# Allegro board HY_IP5389_V10_250411.brd
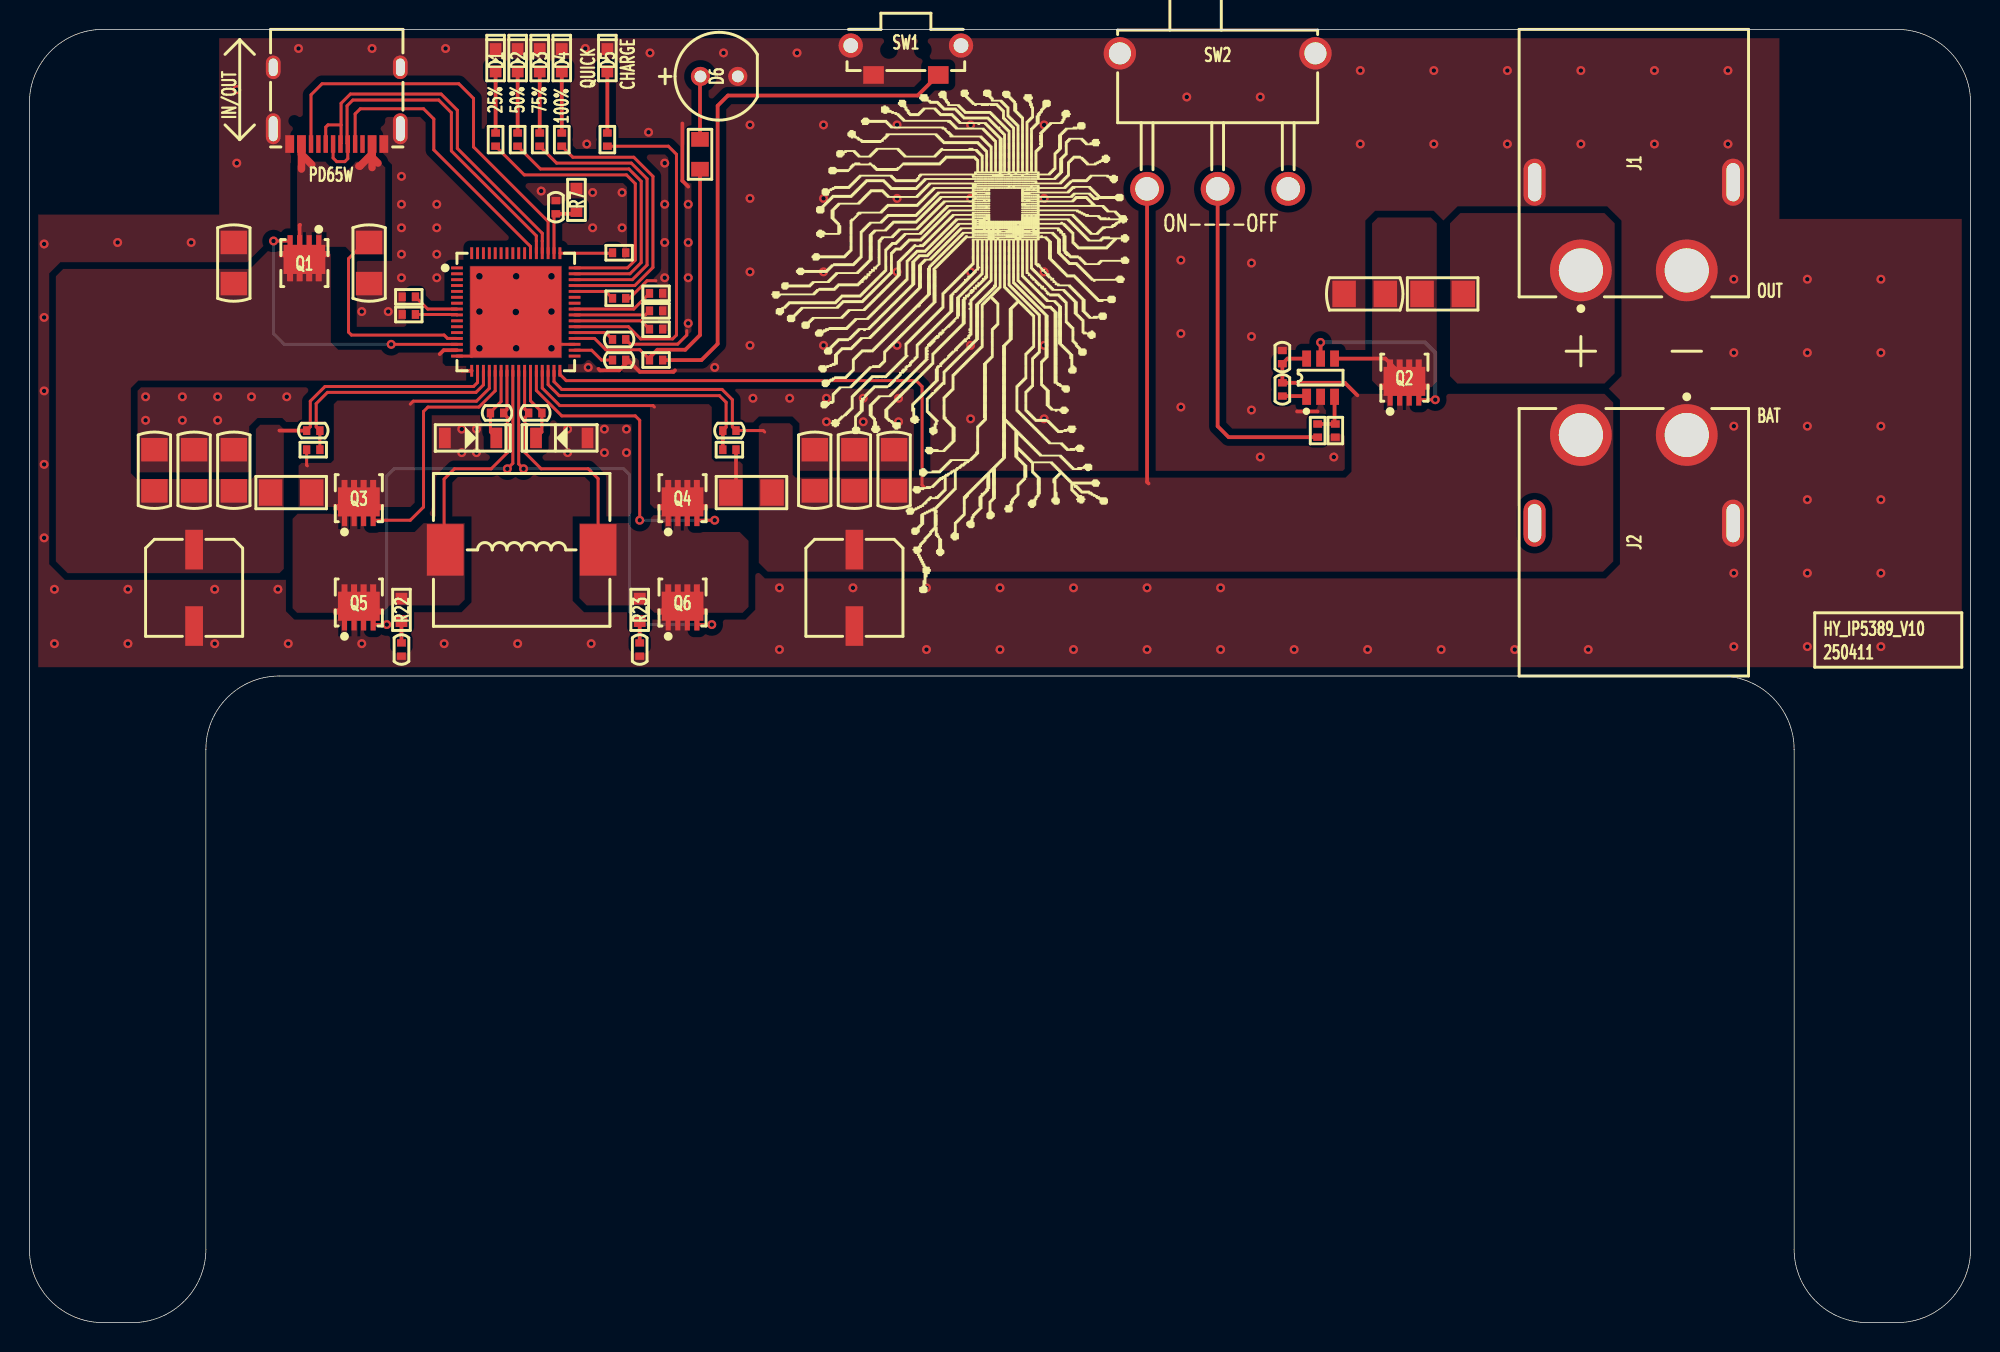
[diagram p0: board, top side]
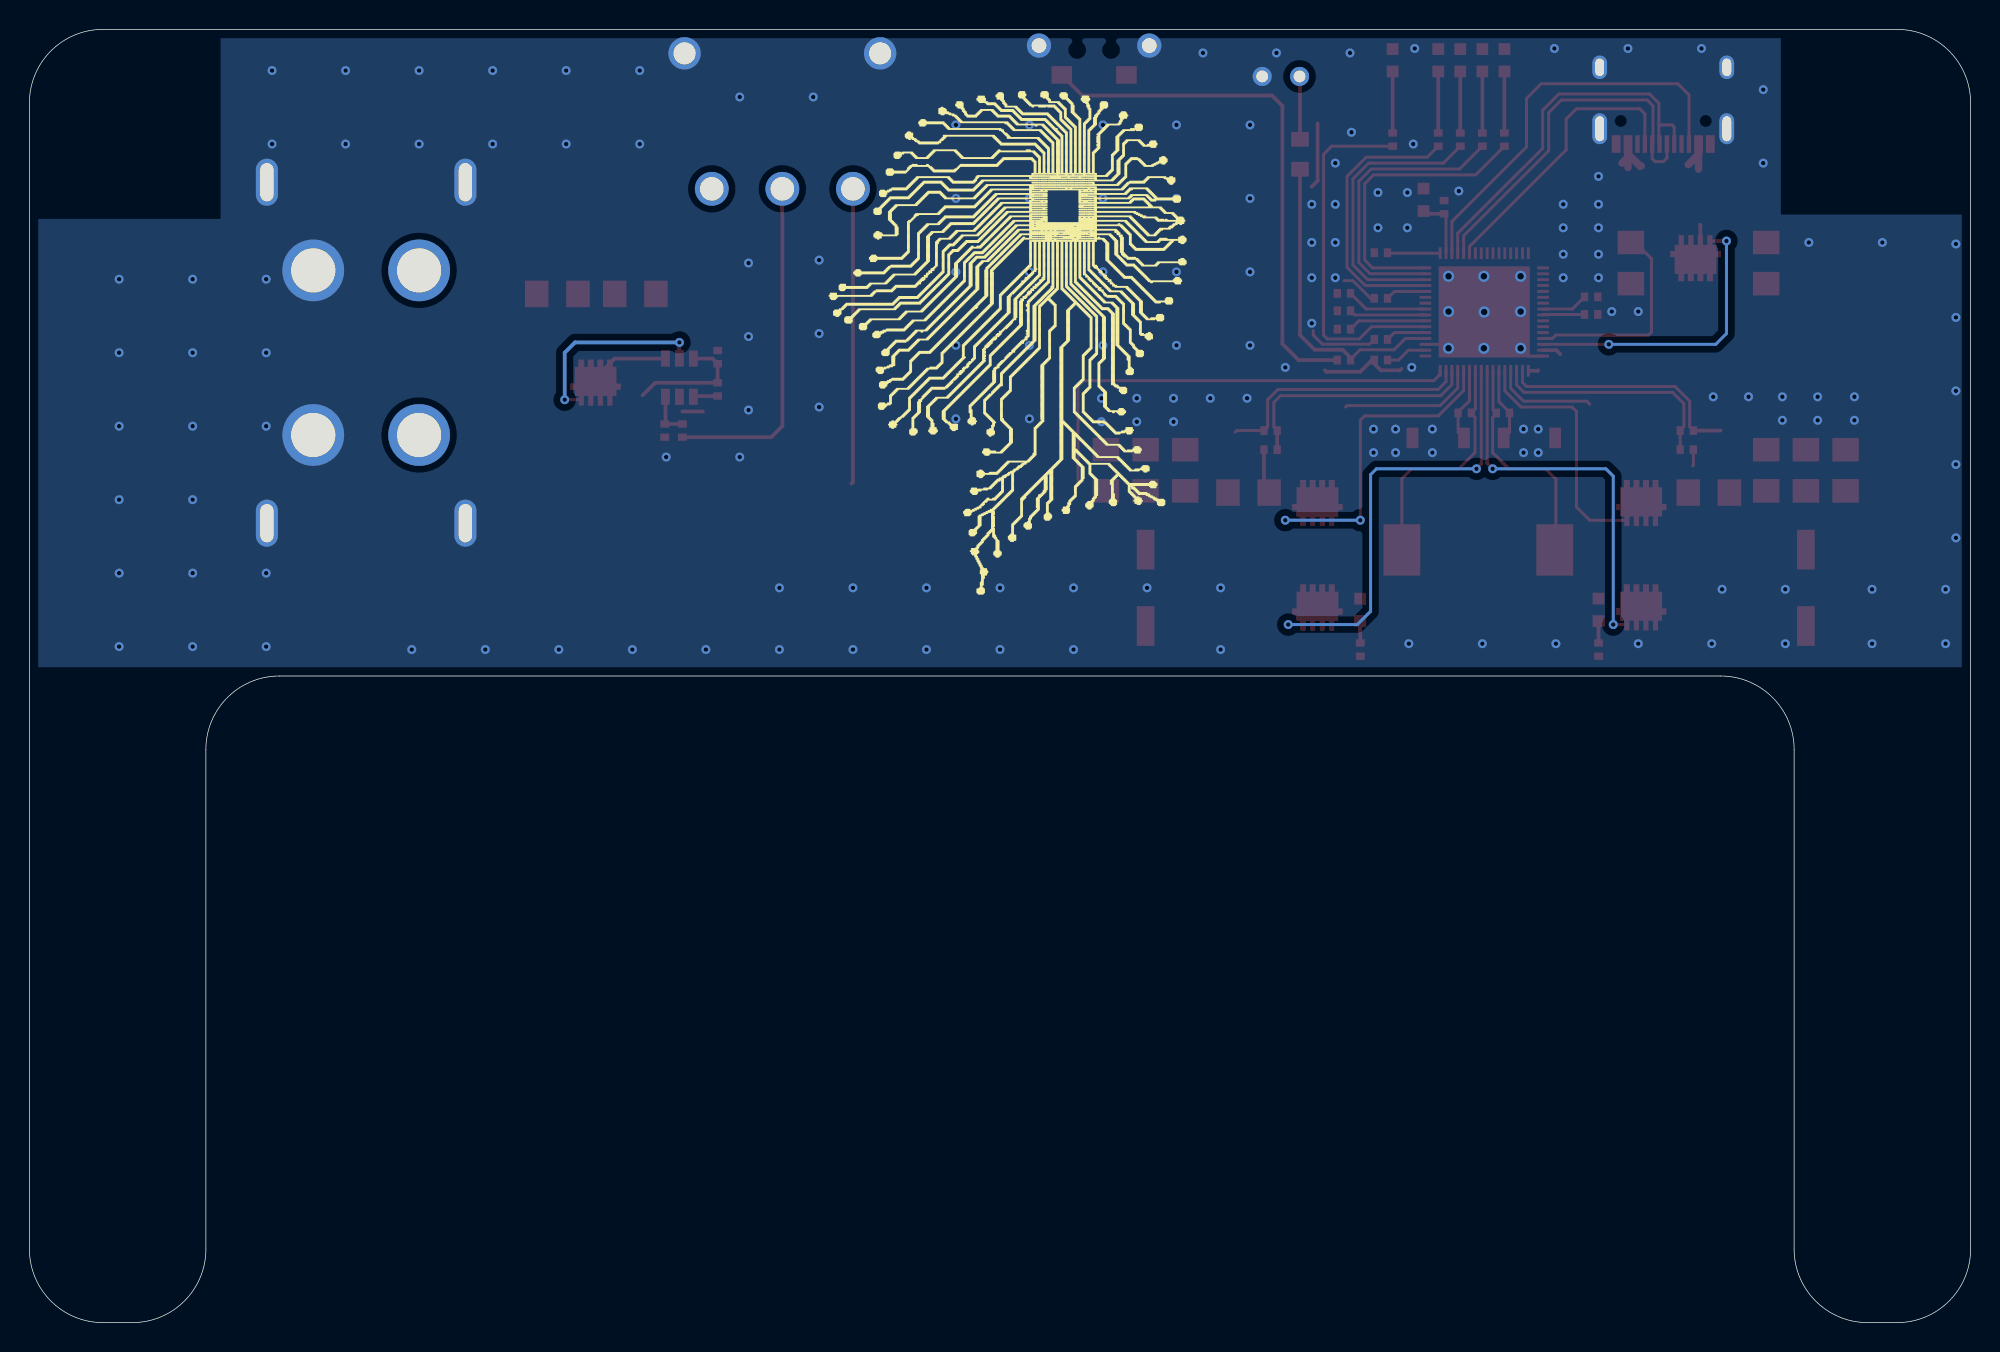
[diagram p1: board, bottom side, seen from below]

Outline 132 x 88 mm; copper layers: TOP, BOTTOM. Coordinates in mm from the lower left corner of the outline.
Outline path: 0,83 arc(1.46,86.54) 5,88 127,88 arc(130.54,86.54) 132,83 132,5 arc(130.54,1.46) 127,0 125,0 arc(121.46,1.46) 120,5 120,39 arc(118.54,42.54) 115,44 17,44 arc(13.46,42.54) 12,39 12,5 arc(10.54,1.46) 7,0 5,0 arc(1.46,1.46) 0,5 0,83

## Design rules (mm)
constraint set DEFAULT: min track width 0.152, pair gap 0.203
net group DP1: nets DMC DPC

## Placement (name value [footprint] x y rotation side)
C1  100nF_50V  [C0402]  35.8 75.9 270 top
C2  10uF_50V  [C1206]  13.9 72.1 270 top
C3  10uF_50V  [C1206]  23.1 72.1 90 top
C4  10uF_50V  [C1206]  90.8 70 0 top
C5  2.2uF_10V  [C0402]  40.1 66.9 180 top
C6  22nF_50V  [C0402]  85.2 65.7 270 top
C7  2.2uF_10V  [C0402]  40.1 65.5 180 top
C8  100nF_50V  [C0402]  85.2 63.5 90 top
C9  100nF_50V  [C0402]  31.8 61.9 0 top
C10  100nF_50V  [C0402]  34.4 61.9 180 top
C11  1uF_16V  [C0402]  19.3 60.7 0 top
C12  1uF_16V  [C0402]  47.6 60.7 0 top
C13  22uF_25V  [C1206]  8.5 58 270 top
C14  22uF_25V  [C1206]  11.2 58 270 top
C15  22uF_25V  [C1206]  13.9 58 270 top
C16  22uF_25V  [C1206]  53.4 58 270 top
C17  22uF_25V  [C1206]  56.1 58 270 top
C18  22uF_25V  [C1206]  58.8 58 270 top
C19  100uF_35V  [CAP-6R3X7R7-SMD]  11.2 50 0 top
C20  100uF_35V  [CAP-6R3X7R7-SMD]  56.1 50 0 top
C21  2.2nF_50V  [C0402]  25.3 45.8 90 top
C22  2.2nF_50V  [C0402]  41.5 45.8 90 top
D1  LED_GREEN  [LED0603]  31.7 85.9 90 top
D2  LED_GREEN  [LED0603]  33.2 85.9 90 top
D3  LED_GREEN  [LED0603]  34.7 85.9 90 top
D4  LED_GREEN  [LED0603]  36.2 85.9 90 top
D5  LED_GREEN  [LED0603]  39.3 85.9 90 top
D6  LED_GREEN  [LED-5R0X5R0]  46.9 84.8 0 top
D7  SMF30CA  [SOD123]  30 60.2 180 top
D8  SMF30CA  [SOD123]  36.2 60.2 0 top
F1  0469005.WR  [FUSE1206]  96.1 70 0 top
J1  -  [XT60PW-F]  109.1 71.6 0 top
J2  -  [XT60PW-M]  109.1 60.4 180 top
L1  FXL1040-100-M  [L10040]  33.47 52.58 0 top
NOREF  -  []  0 0 0 top
NOREF#2  -  []  0 0 90 top
Q1  WSD4070DN  [DFN3X3]  18.7 72.1 180 top
Q2  WSD4070DN  [DFN3X3]  93.5 64.3 0 top
Q3  WSD4070DN  [DFN3X3]  22.4 56.1 0 top
Q4  WSD4070DN  [DFN3X3]  44.41 56.1 0 top
Q5  WSD4070DN  [DFN3X3]  22.4 49 0 top
Q6  WSD4070DN  [DFN3X3]  44.41 49 0 top
R1  4.7K  [R0402]  31.7 80.5 90 top
R2  4.7K  [R0402]  33.2 80.5 90 top
R3  4.7K  [R0402]  34.7 80.5 90 top
R4  4.7K  [R0402]  36.2 80.5 90 top
R5  4.7K  [R0402]  39.3 80.5 90 top
R6  20R  [R0805]  45.6 79.5 90 top
R7  NTCG163JF103FT1S  [R0603]  37.2 76.4 90 top
R8  18K  [R0402]  40.1 72.8 0 top
R9  3.6K  [R0402]  42.61 70.04 0 top
R10  0R  [R0402]  25.8 69.8 180 top
R11  0R  [R0402]  40.1 69.7 0 top
R12  4.99K  [R0402]  42.61 68.85 0 top
R13  0R/NI  [R0402]  25.8 68.6 180 top
R14  27K  [R0402]  42.61 67.6 0 top
R15  4.7K  [R0402]  42.61 65.5 0 top
R16  1K  [R0402]  87.6 60.7 270 top
R17  100K  [R0402]  88.8 60.7 90 top
R18  10R  [R0402]  19.3 59.4 180 top
R19  10R  [R0402]  47.6 59.4 0 top
R20  0R005  [R1206]  17.8 56.48 180 top
R21  0R005  [R1206]  49.1 56.48 180 top
R22  2R  [R0603]  25.3 48.5 90 top
R23  2R  [R0603]  41.5 48.5 90 top
SW1  -  [K2-1112SW-A4SW-04]  59.6 86.6 0 top
SW2  -  [SS-12D11G3R]  80.8 84.8 0 top
U1  IP5389  [QFN64-8X8X0R4-6R2X6R2]  33.07 68.77 270 top
U2  MX74700T  [SOT23-6]  87.8 64.3 0 top
USB1  -  [TYPE-C-31-M-12]  20.9 80.2 180 top

## Library data of the parts
C1-C18 C21 C22 = CAP NP_2
C19 C20 = CAPT_100UF_3528_6r3V_10%_LXXXX
D1-D6 = LED_2
D7 D8 = P6SMB_3
F1 = FUSE
J1 = XT60PW-F
J2 = XT60PW-M
L1 = IND_BEAD_0805_600OHM_1
Q1-Q6 = SI4497DY-T1-GE3_2
R1-R6 R8-R23 = R_Generic
R7 = R_Generic_0
SW1 = SWITCH-SPST-4P
SW2 = SWITCH_3P
U1 = IP5389
U2 = MX74700T
USB1 = TYPE-C_16P

## Footprints (pads in the part's own frame, mm; a bottom-side part is the same pattern mirrored in y, then rotated)
C0402
  rect 0.5x0.6 smd: 1(-0.45,0) 2(0.45,0)
C1206
  rect 1.6x1.8 smd: 1(-1.4,0) 2(1.4,0)
CAP-6R3X7R7-SMD
  rect 1.2x2.7 smd: 1(0,2.6) 2(0,-2.6)
DFN3X3
  rect 0.35x0.8 smd: 1(-0.975,-1.5) 2(-0.325,-1.5) 3(0.325,-1.5) 4(0.975,-1.5)
  custom 3.44x2.48 smd: 5(0,0)
FUSE1206
  rect 1.6x1.8 smd: 1(-1.4,0) 2(1.4,0)
K2-1112SW-A4SW-04
  round 1.65 hole 1: 1(-3.75,0.3) 4(3.75,0.3)
  rect 1.4x1.2 smd: 2(-2.2,-1.7) 3(2.2,-1.7)
L10040
  rect 2.5x3.5 smd: 1(-5.2,0) 2(5.2,0)
LED0603
  rect 0.8x0.8 smd: 1(-0.762,0) 2(0.762,0)
LED-5R0X5R0
  round 1.3 hole 0.8: 1(-1.27,0) 2(1.27,0)
QFN64-8X8X0R4-6R2X6R2
  rect 0.2x0.8 smd: 1(-3,-4) 2(-2.6,-4) 3(-2.2,-4) 4(-1.8,-4) 5(-1.4,-4) 6(-1,-4) 7(-0.6,-4) 8(-0.2,-4) 9(0.2,-4) 10(0.6,-4) 11(1,-4) 12(1.4,-4) 13(1.8,-4) 14(2.2,-4) 15(2.6,-4) 16(3,-4) 33(3,4) 34(2.6,4) 35(2.2,4) 36(1.8,4) 37(1.4,4) 38(1,4) 39(0.6,4) 40(0.2,4) 41(-0.2,4) 42(-0.6,4) 43(-1,4) 44(-1.4,4) 45(-1.8,4) 46(-2.2,4) 47(-2.6,4) 48(-3,4)
  rect 0.8x0.2 smd: 17(4,-3) 18(4,-2.6) 19(4,-2.2) 20(4,-1.8) 21(4,-1.4) 22(4,-1) 23(4,-0.6) 24(4,-0.2) 25(4,0.2) 26(4,0.6) 27(4,1) 28(4,1.4) 29(4,1.8) 30(4,2.2) 31(4,2.6) 32(4,3) 49(-4,3) 50(-4,2.6) 51(-4,2.2) 52(-4,1.8) 53(-4,1.4) 54(-4,1) 55(-4,0.6) 56(-4,0.2) 57(-4,-0.2) 58(-4,-0.6) 59(-4,-1) 60(-4,-1.4) 61(-4,-1.8) 62(-4,-2.2) 63(-4,-2.6) 64(-4,-3)
  rect 6.2x6.2 smd: 65(0,0)
R0402
  rect 0.5x0.6 smd: 1(-0.45,0) 2(0.45,0)
R0603
  rect 0.8x0.8 smd: 1(-0.762,0) 2(0.762,0)
R0805
  rect 1x1.2 smd: 1(-1.016,0) 2(1.016,0)
R1206
  rect 1.6x1.8 smd: 1(-1.4,0) 2(1.4,0)
SOD123
  rect 0.8x1.4 smd: 1(1.75,0) 2(-1.75,0)
SOT23-6
  rect 0.6x1.1 smd: 1(-0.95,-1.3) 2(0,-1.3) 3(0.95,-1.3) 4(0.95,1.3) 5(0,1.3) 6(-0.95,1.3)
SS-12D11G3R
  round 2.2 hole 1.5: 1(-6.65,1.57) 5(6.65,1.57)
  round 2.3 hole 1.6: 2(-4.8,-7.65) 3(0,-7.65) 4(4.8,-7.65)
TYPE-C-31-M-12
  rect 0.6x1.2 smd: 1(-3.2,0) 2(-2.4,0) 11(2.4,0) 12(3.2,0)
  rect 0.3x1.2 smd: 3(-1.75,0) 4(-1.25,0) 5(-0.75,0) 6(-0.25,0) 7(0.25,0) 8(0.75,0) 9(1.25,0) 10(1.75,0)
  oval 1x2.1 hole 0.6x1.7: 13(-4.32,-1.04) 14(4.32,-1.04)
  oval 1x1.6 hole 0.6x1.2: 15(-4.32,-5.22) 16(4.32,-5.22)
XT60PW-F
  round 4.2 hole 3: 1(-3.6,0) 2(3.6,0)
  oval 1.5x3.2 hole 0.9x2.6: 3(-6.75,6) 4(6.75,6)
XT60PW-M
  round 4.2 hole 3: 1(-3.6,0) 2(3.6,0)
  oval 1.5x3.2 hole 0.9x2.6: 3(-6.75,6) 4(6.75,6)

## Nets
GND: C1.1 C2.1 C3.1 C4.1 C5.1 C6.1 C7.1 C13.1 C14.1 C15.1 C16.1 C17.1 C18.1 C19.2 C20.2 C21.1 C22.1 D1.2(CATHODE) D2.2(CATHODE) D3.2(CATHODE) D4.2(CATHODE) D5.2(CATHODE) D6.2(CATHODE) D7.1 D8.1 J1.2 J1.3 J1.4 J2.1 J2.3 J2.4 Q5.1 Q5.2 Q5.3(S3) Q6.1 Q6.2 Q6.3(S3) R7.2 R8.2 R9.2 R10.2 R11.2 R12.2 R13.2 R14.2 R17.1 SW1.1 SW1.2 SW1.4 SW2.1 SW2.5 U1.16 U1.35 U1.65 U2.2 USB1.1 USB1.12 USB1.13 USB1.14 USB1.15 USB1.16
VBAT: C6.2 C8.2 C12.2 C16.2 C17.2 C18.2 C20.1 J2.2 Q2.1 Q2.2 Q2.3(S3) R21.1 SW2.2 U1.31 U1.32 U2.6
VBAT_OUT: F1.2 J1.1
VBUS: C3.2 Q1.1 Q1.2 Q1.3(S3) U1.13 USB1.2 USB1.11(VBUS2)
VBUS_I: C2.2 C11.1 C13.2 C14.2 C15.2 C19.1 Q1.5 R20.2 U1.15 U1.17 U1.18
VBUSG: Q1.4 U1.14
CC1: U1.54 USB1.4
CC2: U1.51 USB1.10
CSN1: C11.2 R18.1 U1.19
CSN2: C12.1 R19.1 U1.30
DMC: U1.53 USB1.5 USB1.7
DPC: U1.52 USB1.6 USB1.8
HG1: Q3.4 U1.21
HG2: Q4.4 U1.28
LG1: Q5.4 U1.24
LG2: Q6.4 U1.25
LX1: C9.2 L1.1 Q3.1 Q3.2 Q3.3(S3) Q5.5 R22.2 U1.23
LX2: C10.2 L1.2(B) Q4.1 Q4.2 Q4.3(S3) Q6.5 R23.2 U1.26
PCIN: Q3.5 R18.2 R20.1 U1.20
PCON: Q4.5 R19.2 R21.2 U1.29
N17571370: C1.2 R7.1 U1.50
N17595914: R13.1 U1.9
N17595917: R10.1 U1.8
N17600187: C9.1 D7.2 U1.22
N17600221: C10.1 D8.2 U1.27
N17606251: R14.1 U1.39
N17606550: R8.1 U1.49
N17606964: R1.1 U1.48
N17606973: R2.1 U1.47
N17607013: R3.1 U1.46
N17607022: R4.1 U1.45
N17607311: R11.1 U1.44
N17607966: R9.1 U1.41(VSET)
N17608064: R12.1 U1.40
N17608763: R5.1 U1.38
N17609805: C7.2 U1.34
N17609810: C5.2 U1.37
N17610066: R6.1 R15.1 U1.36
N17618693: Q2.4 U2.5
N17619229: C4.2 F1.1 Q2.5 U2.4
N17619409: C8.1 U2.1(VCAP)
N17620744: R16.1 R17.2 U2.3
N17623013: R16.2 SW2.3
N175711621: D1.1 R1.2
N175992021: C21.2 R22.1
N175993260: C22.2 R23.1
N176068631: D2.1 R2.2
N176069031: D3.1 R3.2
N176069431: D4.1 R4.2
N176086261: D5.1 R5.2
N176100631: R15.2 SW1.3
N176114881: D6.1 R6.2

Pads without a net: SW2 4; U1 1 2 3 4 5 6 7 10 11 12 33 42 43 55 56 57 58 59 60 61 62 63 64; USB1 3 9

## Via types
v1: diameter 0.61, hole 0.305, TOP to BOTTOM, 171 vias
v2: diameter 0.762, hole 0.457, TOP to BOTTOM, 9 vias

## Routing (per net, layer and track width the routed paths; a pad name or vN(x,y) marks a point on that pad's centre or on a via; arc(x,y) is an arc through that point)
GND: length 26.2
  TOP w0.203: C5.1 40.87,66.58 44.08,66.58 44.7,67.2 44.7,67.5 ; R11.2 40.8,69.7 42,70.9 42.6,70.9 ; v2(33.07,68.77) 30.07,65.77 U1.16 ; U1.35 35.77,66.57 v2(35.5,66.3)
  TOP w0.254: 44.8,77.3 44.4,77.7 44.4,81.6 ; 38.7,64.9 38.8,64.8 40.1,64.8 40.55,65.25 C7.1 40.7,65.5 41.5,64.7 43.8,64.7 43.9,64.8 ; 87.6,62 86.2,62
  vias: v1(1,73.4) v1(1,68.4) v1(1,63.4) v1(1,58.4) v1(1,53.4) v1(1.7,49.9) v1(1.7,46.2) v1(6,73.5) v1(6.7,49.9) v1(6.7,46.2) v1(7.9,63) v1(7.9,61.4) v1(10.4,63) v1(10.4,61.4) v1(11,73.5) v1(12.6,49.9) v1(12.6,46.2) v1(12.8,63) v1(12.8,61.4) v1(14.1,83.9) v1(14.1,78.9) v1(15.1,63) v1(16.9,49.9) v1(17.5,63) v1(17.6,46.2) v1(18.3,86.7) v1(22.6,68.8) v1(22.6,46.2) v1(23.3,86.7) v1(24.4,68.8) v1(25.3,78) v1(25.3,76.1) v1(25.3,74.5) v1(25.3,72.7) v1(25.3,71.1) v1(27.7,76.1) v1(27.7,74.5) v1(27.7,72.7) v1(27.7,71.1) v1(28.2,46.2) v1(28.3,86.7) v1(29.4,60.8) v1(29.4,59.2) v1(30.4,60.8) v1(30.4,59.2) v1(33.2,46.2) v1(34.8,77) v1(36.6,60.8) v1(36.6,59.2) v1(37.8,86.7) v1(37.9,80.2) v1(38,65) v1(38.2,46.2) v1(38.3,76.9) v1(38.3,74.5) v1(39.1,60.8) v1(39.1,59.2) v1(40.3,76.9) v1(40.3,74.5) v1(40.6,60.8) v1(40.6,59.2) v1(42.1,81) v1(42.2,86.4) v1(43.2,78.9) v1(43.2,76.1) v1(43.2,73.5) v1(43.2,71.1) v1(44.8,76.1) v1(44.8,73.5) v1(44.8,71.1) v1(44.8,68) v1(46.6,65) v1(47.2,86.4) v1(49,81.5) v1(49,76.5) v1(49,71.5) v1(49,66.5) v1(49.2,62.9) v1(51,50) v1(51,45.8) v1(51.7,62.9) v1(52.2,86.4) v1(54,81.5) v1(54,76.5) v1(54,71.5) v1(54,66.5) v1(54.2,62.9) v1(54.2,61.3) v1(56,50) v1(56.7,62.9) v1(56.7,61.3) v1(59,81.5) v1(59,76.5) v1(59,71.5) v1(59,66.5) v1(59.1,62.9) v1(59.1,61.3) v1(61,50) v1(61,45.8) v1(64,81.5) v1(64,76.5) v1(64,71.5) v1(64,66.5) v1(64,61.5) v1(66,50) v1(66,45.8) v1(69,81.5) v1(69,76.5) v1(69,71.5) v1(69,66.5) v1(69,61.5) v1(71,50) v1(71,45.8) v1(76,50) v1(76,45.8) v1(78.3,72.3) v1(78.3,67.3) v1(78.3,62.3) v1(78.7,83.4) v1(81,50) v1(81,45.8) v1(83.1,72.1) v1(83.1,67.1) v1(83.1,62.1) v1(83.7,83.4) v1(83.7,58.9) v1(86,45.8) v1(88.7,58.9) v1(90.5,85.2) v1(90.5,80.2) v1(91,45.8) v1(95.5,85.2) v1(95.5,80.2) v1(96,45.8) v1(100.5,85.2) v1(100.5,80.2) v1(101,45.8) v1(105.5,85.2) v1(105.5,80.2) v1(106,45.8) v1(110.5,85.2) v1(110.5,80.2) v1(115.5,85.2) v1(115.5,80.2) v1(115.9,71) v1(115.9,66) v1(115.9,61) v1(115.9,51) v1(115.9,46) v1(120.9,71) v1(120.9,66) v1(120.9,61) v1(120.9,56) v1(120.9,51) v1(120.9,46) v1(125.9,71) v1(125.9,66) v1(125.9,61) v1(125.9,56) v1(125.9,51) v1(125.9,46) v2(30.6,71.2) v2(30.6,68.8) v2(30.6,66.3) v2(33.1,71.2) v2(33.1,66.3) v2(35.5,71.2) v2(35.5,68.8)
VBAT: length 78.4
  TOP w0.203: U1.32 36.07,64.53 36.5,64.1 60.3,64.1 60.7,63.7 60.7,57 60.9,56.8 ; 50,60.6 49.9,60.7 C12.2 47.8,60.95 47.8,62.8 47.1,63.5 36.2,63.5 35.67,64.03 U1.31
  TOP w0.254: 90.3,63.1 89.45,63.95 C8.2 C6.2 85.55,65.6 U2.6 ; SW2.2 76,57.2 76.1,57.1
VBUS: length 21.6
  TOP w0.203: U1.13 28.43,66.97 28.2,67.2 21.9,67.2 21.7,67.4 21.7,72.4 22.8,73.5 C3.2
  TOP w0.254: 18.4,74.7 18.38,74.67 Q1.3
  TOP w0.508: USB1.2 23.3,79.53 ; 23.3,79.53 22.47,78.7 22.4,78.7 ; 23.3,79.53 23.3,79.3 ; USB1.11 18.5,79.5 ; 18.5,79.5 19.2,78.8 ; 18.5,79.5 18.5,78.5 ; 23.3,79.3 23.7,78.9 ; 23.3,79.3 23.3,78.6
VBUS_I: length 18.6
  TOP w0.203: U1.18 30.47,63.97 30.2,63.7 20.1,63.7 19.1,62.7 19.1,60.95 C11.1
  TOP w0.254: U1.17 29.43,64.77 29.4,64.8 ; U1.15 28.17,66.17 27.9,65.9 ; C11.1 17,60.7
VBUSG: length 20.2
  TOP w0.203: Q1.4 v1(16.6,73.6) ; U1.14 v1(24.6,66.57)
  BOTTOM w0.203: v1(24.6,66.57) 17.33,66.57 16.6,67.3 v1(16.6,73.6)
CC1: length 19.7
  TOP w0.203: USB1.4 22.15,82.25 22.5,82.6 26.8,82.6 27.5,81.9 27.5,79.8 34.07,73.23 U1.54
CC2: length 27.8
  TOP w0.203: USB1.10 19.15,83.55 19.9,84.3 29.2,84.3 30.2,83.3 30.2,80 35.27,74.93 U1.51
CSN1: length 16.1
  TOP w0.203: U1.19 30.87,63.81 30.37,63.3 20.27,63.3 19.5,62.53 19.5,60.95 C11.2 R18.1
CSN2: length 16.9
  TOP w0.203: U1.30 35.27,63.83 36.02,63.08 46.92,63.08 47.38,62.62 47.38,60.93 C12.1
  TOP w0.254: R19.1 C12.1
DMC: length 25.3
  TOP w0.203: U1.53 34.47,73.6 34.47,73.6 34.47,73.96 28.69,79.73 28.69,82.33 27.83,83.19 21.99,83.19 21.6,82.8 21.6,80.25 USB1.5 21.65,79.2 21.45,79 20.9,79 20.65,79.25 USB1.7
DPC: length 25.8
  TOP w0.203: USB1.8 20.15,81.35 20.3,81.5 21.19,81.5 ; 21.19,81.5 21.19,80.24 USB1.6 ; 21.19,81.5 21.19,82.97 21.83,83.6 28,83.6 29.1,82.5 29.1,79.9 34.88,74.12 34.88,73.6 34.87,73.6 U1.52
HG1: length 17.1
  TOP w0.203: Q3.4 25.9,54.6 26.8,55.5 26.8,62 27.1,62.3 30.57,62.3 31.67,63.41 U1.21
HG2: length 22.3
  TOP w0.203: v1(41.5,54.6) 41.5,61.4 41.2,61.7 36.2,61.7 34.47,63.43 U1.28 ; v1(46.6,54.6) Q4.4
  BOTTOM w0.203: v1(41.5,54.6) v1(46.6,54.6)
LG1: length 26.3
  TOP w0.203: v1(32.5,58.1) 32.87,58.47 U1.24 ; Q5.4 v1(24.3,47.5)
  BOTTOM w0.203: v1(32.5,58.1) 24.8,58.1 24.3,57.6 v1(24.3,47.5)
LG2: length 30.5
  TOP w0.203: Q6.4 v1(46.4,47.5) ; v1(33.6,58.1) 33.27,58.43 U1.25
  BOTTOM w0.203: v1(33.6,58.1) 40.4,58.1 40.8,57.7 40.8,48.4 41.7,47.5 v1(46.4,47.5)
LX1: length 15.7
  TOP w0.203: U1.23 32.47,62.12 C9.2 32.25,61.85 32.5,61.6 32.5,59.2 31.4,58.1 28.9,58.1 28.2,57.4 28.2,52.65 L1.1
LX2: length 16.3
  TOP w0.203: U1.26 33.67,62.18 C10.2 33.95,61.85 33.7,61.6 33.7,59.2 34.8,58.1 38,58.1 38.67,57.43 L1.2
PCIN: length 8.1
  TOP w0.203: 25.9,62.5 26.1,62.7 30.4,62.7 31.27,63.57 U1.20 ; 18.9,58.3 18.85,58.35 R18.2
PCON: length 12.4
  TOP w0.203: U1.29 34.87,63.59 36.07,62.4 42.4,62.4 42.5,62.3
  TOP w0.254: R21.2 48.05,56.83 R19.2
N17571370: length 4.2
  TOP w0.203: U1.50 35.67,75.32 C1.2
  TOP w0.254: R7.1 37.01,75.45 C1.2
N17595914: length 2.8
  TOP w0.203: R13.1 29.04,68.6 U1.9
N17595917: length 3.2
  TOP w0.203: U1.8 27.08,68.97 R10.1
N17600187: length 5
  TOP w0.203: D7.2 31.35,60.6 C9.1 31.35,61.95 32.07,62.67 U1.22
N17600221: length 5.1
  TOP w0.203: U1.27 34.07,62.73 34.85,61.95 C10.1 34.85,60.6 D8.2
N17606251: length 5.3
  TOP w0.203: U1.39 41.59,68.17 R14.1
N17606550: length 3.6
  TOP w0.203: R8.1 39.62,72.77 U1.49
N17606964: length 20.1
  TOP w0.203: R1.1 33.65,78.1 40.6,78.1 41.2,77.5 41.2,72.3 40.67,71.77 U1.48
N17606973: length 19.8
  TOP w0.203: R2.1 34.75,78.5 40.77,78.5 41.6,77.67 41.6,72.13 40.84,71.37 U1.47
N17607013: length 19.4
  TOP w0.203: R3.1 35.85,78.9 40.93,78.9 42,77.83 42,71.97 41,70.97 U1.46
N17607022: length 19.1
  TOP w0.203: U1.45 41.17,70.57 42.4,71.8 42.4,78 41.1,79.3 36.95,79.3 R4.1
N17607311: length 2.8
  TOP w0.203: U1.44 39.18,70.17 R11.1
N17607966: length 5.5
  TOP w0.203: R9.1 41.09,68.97 U1.41
N17608064: length 5.2
  TOP w0.203: R12.1 41.88,68.57 U1.40
N17608763: length 24.6
  TOP w0.203: U1.38 40.73,67.77 41.56,66.94 43.74,66.94 44,67.2 44,79.5 43.45,80.05 R5.1
N17609805: length 2.9
  TOP w0.203: U1.34 38.23,66.17 38.9,65.5 C7.2
N17609810: length 2.8
  TOP w0.203: U1.37 39.18,67.37 C5.2
N17610066: length 21.2
  TOP w0.203: U1.36 38.43,66.97 39.2,66.2 41.51,66.2 42.16,65.55
  TOP w0.254: R15.1 42.16,65.66 42.7,66.2 44.6,66.2 45.6,67.2 R6.1
N17618693: length 13.5
  TOP w0.203: Q2.4 v1(95.6,62.8)
  TOP w0.254: U2.5 v1(87.8,66.7)
  BOTTOM w0.254: v1(95.6,62.8) 95.6,66 94.9,66.7 v1(87.8,66.7)
N17619229: length 5.3
  TOP w0.254: Q2.5 92.2,65.6 U2.4
N17619409: length 1.7
  TOP w0.254: C8.1 86.8,63.05 U2.1
N17620744: length 3.1
  TOP w0.254: U2.3 88.75,61.2 R17.2 R16.1
N17623013: length 23.3
  TOP w0.254: SW2.3 80.8,61 81.55,60.25 R16.2
N175711621: length 4.2
  TOP w0.254: R1.2 D1.1
N175992021: length 1.5
  TOP w0.254: R22.1 C21.2
N175993260: length 1.5
  TOP w0.254: R23.1 C22.2
N176068631: length 4.2
  TOP w0.254: R2.2 D2.1
N176069031: length 4.2
  TOP w0.254: R3.2 D3.1
N176069431: length 4.2
  TOP w0.254: R4.2 D4.1
N176086261: length 4.2
  TOP w0.254: R5.2 D5.1
N176100631: length 36.3
  TOP w0.254: SW1.3 60.4,83.5 47.5,83.5 46.8,82.8 46.8,66.6 45.7,65.5 R15.2
N176114881: length 4.3
  TOP w0.254: D6.1 45.6,84.77 R6.2

## Copper pours and planes (outline as drawn; the poured copper is in the pictures)
GND on TOP: 12.9,87.4 119,87.4 119,75.1 131.4,75.1 131.4,44.6 0.6,44.6 0.6,75.4 12.9,75.4 ; 12 cut-outs
GND on BOTTOM: 12.9,87.4 119,87.4 119,75.1 131.4,75.1 131.4,44.6 0.6,44.6 0.6,75.4 12.9,75.4
VBAT on TOP: 93.6,63.2 107.1,63.2 107.7,62.6 107.7,51.8 107,51.1 50.2,51.1 49.6,51.7 49.6,61 49.8,61.2 51.7,61.2 51.9,61 51.9,57.7 52.1,57.5 89.5,57.5 89.9,57.9 89.9,62.9 90.2,63.2 92.7,63.2 92.7,62.1 93,62.1 93,63.2 93.4,63.2 93.4,62.1 93.6,62.1 ; 1 cut-out
VBAT_OUT on TOP: 96.6,74.8 96.6,64.4 97.1,63.9 107.1,63.9 107.8,64.6 107.8,74.8 107.1,75.5 97.3,75.5
VBUS on TOP: 18.5,79 23.8,79 24.2,78.6 24.2,72.7 22,72.7 21.5,73.2 19.5,73.2 19.5,74.2 19.2,74.2 19.2,73.2 18.8,73.2 18.8,74.2 18.6,74.2 18.6,73.2 18.2,73.2 18.2,78.7 ; 1 cut-out
VBUS_I on TOP: 16.2,72.9 20.3,72.9 20.5,72.7 20.5,66.7 21,66.2 28,66.2 28.1,66.1 28.1,65.3 28.3,65.1 29.7,65.1 29.7,64.1 7.4,64.1 6.9,63.6 6.9,57.8 7.3,57.4 15.1,57.4 15.4,57.7 15.4,60.8 15.7,61.1 17,61.1 17.3,60.8 17.3,51.3 17,51 2.6,51 1.8,51.8 1.8,71.2 2.3,71.7 15,71.7
LX1 on TOP: 22.9,55.1 18.3,55.1 17.9,54.7 17.9,48.6 18.2,48.3 24,48.3 24.5,48.8 29.2,48.8 29.6,49.2 29.6,54.4 26.8,54.4 26.2,53.8 23.3,53.8 22.9,54.2 ; 3 cut-outs
LX2 on TOP: 44.5,55 44.9,55 44.9,54.1 45.2,53.8 48.3,53.8 48.9,53.2 48.9,48.7 48.5,48.3 42.5,48.3 42,48.8 37.9,48.8 37.4,49.3 37.4,54.4 41.9,54.4 42.5,55 43.7,55 43.7,53.9 43.8,53.9 43.8,55 44.3,55 44.3,53.9 44.5,53.9 ; 1 cut-out
PCIN on TOP: 18.3,55.5 25.9,55.5 26.2,55.8 26.2,62.6 26,62.8 21,62.8 20.7,62.5 20.7,58.7 20.5,58.5 18.5,58.5 18.3,58.3
PCON on TOP: 42.5,55.4 48.5,55.4 48.5,58.4 48.3,58.6 46.6,58.6 46.4,58.8 46.4,62.3 46.2,62.5 42.3,62.5 42.2,62.4 42.2,55.7
N17619229 on TOP: 91.8,63.6 95.3,63.6 95.7,64 95.7,74.8 95.3,75.2 91.7,75.2 91.3,74.8 91.3,64.1

## Text on the board
Ref Des/Silkscreen Top: PD65W | OUT | BAT | HY_IP5389_V10 | 250411 | IN/OUT | 25% | 50% | 75% | 100% | QUICK | CHARGE | ON----OFF
BODY_CENTER: FIGURE | FINISHED_SIZE | 0.3048 | 0.4572 | 0.8 | 1.0 | 1.5 | 1.6 | 3.0 | 1.2x0.6 | 1.7x0.6 | 2.6x0.9 | DRILLED_SIZE | - | DRILL CHART: TOP to BOTTOM | ALL UNITS ARE IN MILLIMETERS | ROTATION | 90.000 | PLATED | QTY | 171 | 9 | 2 | 3 | 4 | 201 | TOTAL HOLES:
